# Altium PCB proj_pankov_control_board.PcbDoc (part 2 of 2)
Units mm, origin at the board's own origin, x right, y up, seen from the top; angles counter-clockwise.
Board outline 150 x 100 mm, 2 copper layers (Top Layer, Bottom Layer), stack 1.536 mm thick; 103 components, 103 nets, 425 pads, 60 vias.
Unrouted connection lines stored in the file: 170.
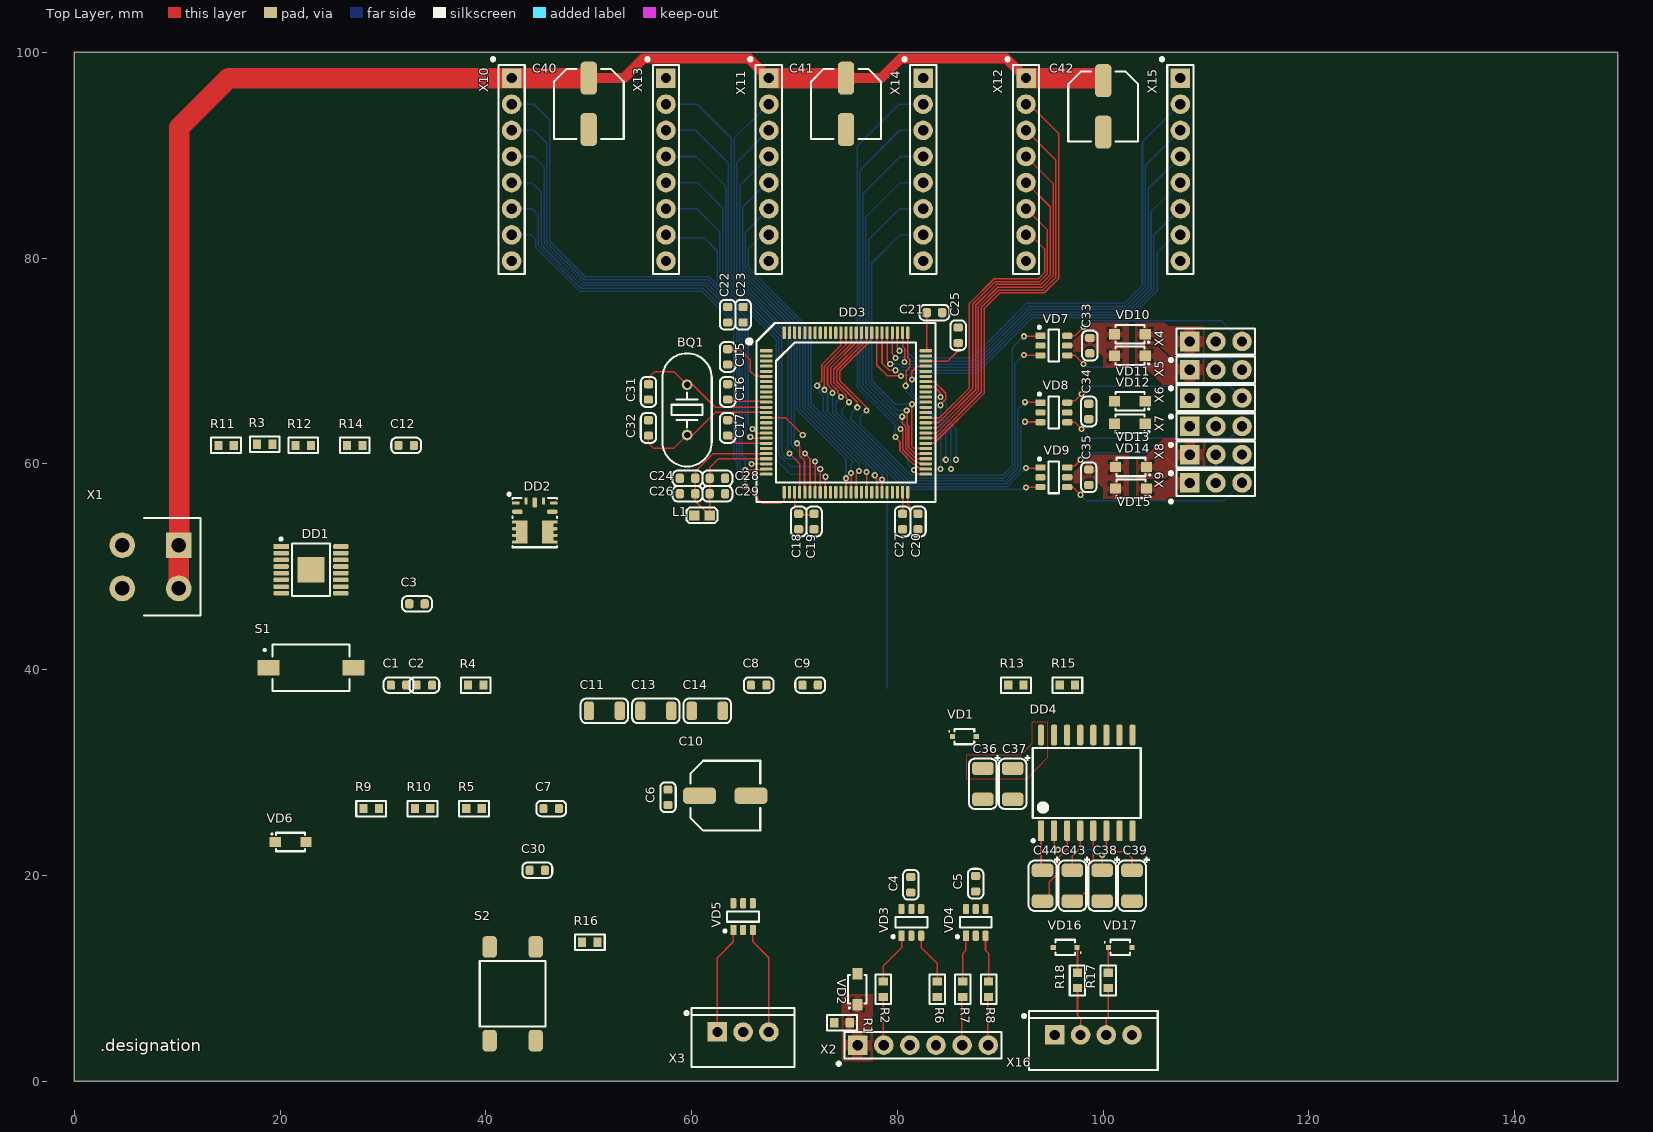
[diagram p0: Top Layer view]

## Via types
v1: diameter 0.6, hole 0.3, Top Layer to Bottom Layer, tented both sides, 60 vias

## Nets (pads, with @x,y where several pads share a name; then routed paths per layer and width w, separated by ;. In a path a pad name is that pad's centre, name@x,y a point inside that pad or via, vN(x,y) a via of type N, cw(c..) or ccw(c..) an arc to the next point about the centre after c; other vN are vias at no path point) (continued)
MCU_DEV1_nFAULT: (continued)
  Bottom Layer w0.15: X13.6 60.5,84.8 62.75,82.55 62.75,77.961 68.475,72.236 68.475,60.886 69.611,59.75 72.25,59.75 v1(72.5,59.5)
MCU_DEV1_nSLEEP: DD3.17 X10.2 | length 51.1
  Top Layer w0.15: v1(65.9,63.4) 66.3,63 DD3.17
  Bottom Layer w0.15: X10.2 44.64,94.96 46.2,93.4 46.2,81.645 49.645,78.2 61.7,78.2 65.475,74.425 65.475,63.825 v1(65.9,63.4)
MCU_DEV1_nSTALL: DD3.34 X13.7 | length 35.3
  Top Layer w0.15: DD3.34 v1(73,58.75)
  Bottom Layer w0.15: X13.7 57.76,82 61.2,82 62.475,80.725 62.475,77.847 68.2,72.122 68.2,60.411 69.611,59 72.628,59 72.878,58.75 v1(73,58.75)
MCU_DEV1_RESET: DD3.18 X10.3 | length 49.4
  Top Layer w0.15: v1(65.7,62.6) 65.8,62.5 DD3.18
  Bottom Layer w0.15: X10.3 44.68,92.42 45.925,91.175 45.925,81.531 49.556,77.9 61.611,77.9 65.2,74.311 65.2,63.1 v1(65.7,62.6)
MCU_DEV1_STEP/AIN1: DD3.23 X10.4 | length 49.2
  Top Layer w0.15: v1(65.8,60) DD3.23
  Bottom Layer w0.15: X10.4 44.62,89.88 45.65,88.85 45.65,81.417 49.442,77.625 61.425,77.625 64.925,74.125 64.925,60.875 v1(65.8,60)
MCU_DEV2_BIN1: DD3.44 X11.6 | length 33.8
  Top Layer w0.15: v1(77.8,58.9) 77.8,58.778 78,58.578 DD3.44
  Bottom Layer w0.15: X11.6 65.225,82.525 65.225,78.986 71.325,72.886 71.325,65.775 77.8,59.3 v1(77.8,58.9)
MCU_DEV2_BIN2: DD3.45 X11.7 | length 31.7
  Top Layer w0.15: DD3.45 78.6,57.35 78.5,57.45 v1(78.5,58.5)
  Bottom Layer w0.15: X11.7 66.86,82.26 65.5,80.9 65.5,79.1 71.6,73 71.6,65.9 76.875,60.625 76.875,60.614 78.5,58.989 v1(78.5,58.5)
MCU_DEV2_DIR/AIN2: DD3.42 X11.5 | length 36.3
  Top Layer w0.15: DD3.42 v1(77,59.2)
  Bottom Layer w0.15: X11.5 67.419,87.421 64.95,84.951 64.95,78.872 71.05,72.772 71.05,65.639 77,59.689 v1(77,59.2)
MCU_DEV2_nFAULT: DD3.55 X14.6 | length 30.8
  Top Layer w0.15: v1(80.9,65.2) 80.963,65.137 80.963,63.833 81.075,63.721 81.075,61.614 81.689,61 DD3.55
  Bottom Layer w0.15: v1(80.9,65.2) 80,65.2 77.225,67.975 77.225,81.825 80.2,84.8 X14.6
MCU_DEV2_nSLEEP: DD3.38 X11.2 | length 44.8
  Top Layer w0.15: DD3.38 v1(75,58.6)
  Bottom Layer w0.15: X11.2 67.761,94.699 67.199,94.699 66.897,95 66.897,94.397 64.125,91.625 64.125,78.53 70.225,72.43 70.225,65.275 75,60.5 v1(75,58.6)
MCU_DEV2_nSTALL: DD3.56 X14.7 | length 28.4
  Top Layer w0.15: v1(81.4,65.8) 81.4,61.7 81.6,61.5 DD3.56 DD3.56@82.3,61.5
  Bottom Layer w0.15: v1(81.4,65.8) 79.789,65.8 77.5,68.089 77.5,79.5 80.26,82.26 X14.7
MCU_DEV2_RESET: DD3.39 X11.3 | length 41.2
  Top Layer w0.15: DD3.39 v1(75.5,59.125)
  Bottom Layer w0.15: X11.3 64.4,89.32 64.4,78.644 70.5,72.544 70.5,65.389 75.7,60.189 75.5,59.989 v1(75.5,59.125)
MCU_DEV2_STEP/AIN1: DD3.40 X11.4 | length 38.7
  Top Layer w0.15: DD3.40 76,59.025 v1(76.275,59.3)
  Bottom Layer w0.15: X11.4 64.675,87.055 64.675,78.758 70.775,72.658 70.775,65.525 76.275,60.025 v1(76.275,59.3)
MCU_DEV3_BIN1: DD3.61 X12.6 | length 29.8
  Top Layer w0.15: DD3.61 82.775,64.025 84.025,64.025 87.3,67.3 87.3,75.511 89.514,77.725 93.814,77.725 94.575,78.486 94.575,82.725 X12.6
MCU_DEV3_BIN2: DD3.62 X12.7 | length 26.9
  Top Layer w0.15: DD3.62 84.111,64.5 87,67.389 87,75.6 89.4,78 93.7,78 94.3,78.6 94.3,80.9 92.94,82.26 X12.7
MCU_DEV3_DIR/AIN2: DD3.60 X12.5 | length 33
  Top Layer w0.15: DD3.60 83.9,63.5 87.6,67.2 87.6,75.422 89.628,77.45 93.928,77.45 94.85,78.372 94.85,84.99 X12.5
MCU_DEV3_nFAULT: DD3.81 X15.6 | length 41.9
  Top Layer w0.15: DD3.81 78.5,69.793 79.193,69.1 v1(79.8,69.1)
  Bottom Layer w0.15: v1(79.8,69.1) 87.611,69.1 92.986,74.475 102.486,74.475 104.919,76.908 104.919,82.219 X15.6
MCU_DEV3_nSLEEP: DD3.57 X12.2 | length 42.8
  Top Layer w0.15: DD3.57 83.578,62 88.425,66.847 88.425,75.08 89.97,76.625 94.27,76.625 95.675,78.03 95.675,92.125 92.84,94.96 X12.2
MCU_DEV3_nSTALL: DD3.82 X15.7 | length 40.9
  Top Layer w0.15: DD3.82 78,69.6 79.05,68.55 v1(80.35,68.55)
  Bottom Layer w0.15: v1(80.35,68.55) 81.043,68.55 81.293,68.8 87.7,68.8 93.1,74.2 102.6,74.2 105.236,76.836 105.236,80.536 106.96,82.26 X15.7
MCU_DEV3_RESET: DD3.58 X12.3 | length 39.4
  Top Layer w0.15: DD3.58 83.689,62.5 88.15,66.961 88.15,75.194 89.856,76.9 94.156,76.9 95.4,78.144 95.4,89.52 X12.3
MCU_DEV3_STEP/AIN1: DD3.59 X12.4 | length 36.2
  Top Layer w0.15: DD3.59 83.8,63 87.875,67.075 87.875,75.308 89.742,77.175 94.042,77.175 95.125,78.258 95.125,87.255 X12.4
MCU_LIMSW_XMAX: DD3.84 VD7.3 | length 42.3
  Top Layer w0.15: v1(76.1,65.5) 76.1,65.996 74.1,67.996 74.1,69.111 77,72.011 DD3.84 ; v1(92.3,70.6) 92.325,70.575 93.875,70.575 VD7.3
  Bottom Layer w0.15: v1(76.1,65.5) 75.5,64.9 75.5,64.333 81.208,58.625 90.358,58.625 91.422,59.689 91.422,69.722 v1(92.3,70.6)
MCU_LIMSW_XMIN: DD3.83 VD7.1 | length 43.4
  Top Layer w0.15: v1(77,65.2) 77,65.5 74.4,68.1 74.4,69.022 77.5,72.122 DD3.83 ; v1(92.3,72.4) 93.85,72.4 VD7.1
  Bottom Layer w0.15: v1(77,65.2) 76.4,64.6 76.4,63.822 81.322,58.9 90.244,58.9 91.147,59.803 91.147,71.247 v1(92.3,72.4)
MCU_LIMSW_YMAX: DD3.86 VD8.3 | length 37.1
  Top Layer w0.15: v1(74.5,66.5) 74.5,66.622 74.2,66.922 74.2,67.118 73.5,67.818 73.5,69.322 76,71.822 DD3.86 ; v1(92.4,64.1) 92.425,64.075 93.875,64.075 VD8.3
  Bottom Layer w0.15: v1(74.5,66.5) 74,66 74,65.056 80.981,58.075 90.586,58.075 91.975,59.464 91.975,63.675 v1(92.4,64.1)
MCU_LIMSW_YMIN: DD3.85 VD8.1 | length 38.5
  Top Layer w0.15: v1(75.3,66) 75.3,66.122 75,66.422 75,66.707 73.8,67.907 73.8,69.2 76.5,71.9 DD3.85 ; v1(92.4,66) 93.85,66 VD8.1
  Bottom Layer w0.15: v1(75.3,66) 74.6,65.3 74.6,64.845 81.095,58.35 90.472,58.35 91.7,59.578 91.7,65.3 v1(92.4,66)
MCU_LIMSW_ZMAX: DD3.88 VD9.3 | length 32.6
  Top Layer w0.15: v1(72.9,67.2) 72.9,69.5 75,71.6 DD3.88 ; v1(92.5,57.7) 92.525,57.725 93.875,57.725 VD9.3
  Bottom Layer w0.15: v1(72.9,67.2) 72.9,67.078 73.2,66.778 73.2,65.078 80.753,57.525 92.203,57.525 92.378,57.7 v1(92.5,57.7)
MCU_LIMSW_ZMIN: DD3.87 VD9.1 | length 32.9
  Top Layer w0.15: v1(73.7,66.9) 73.7,67.2 73.2,67.7 73.2,69.411 75.5,71.711 DD3.87 ; v1(92.5,59.6) 93.85,59.6 VD9.1
  Bottom Layer w0.15: v1(73.7,66.9) 73.7,64.967 80.867,57.8 90.7,57.8 v1(92.5,59.6)
MCU_nINT: DD3.35 VD5.6
MCU_nKILL: DD3.36 VD5.4
MCU_nRST: C30.1 DD3.14 R16.1 S2.1 VD4.6 | length 4.3
  Top Layer w0.15: DD3.14 69.1,64.5 v1(70.8,62.8)
MCU_SPI1_MISO: DD3.31 X13.3 | length 42.9
  Top Layer w0.15: v1(71,61) 71.5,60.5 DD3.31
  Bottom Layer w0.15: X13.3 60.38,92.42 63.575,89.225 63.575,78.303 69.675,72.203 69.675,61.825 70.25,61.25 70.75,61.25 v1(71,61)
MCU_SPI1_MOSI: DD3.32 X13.5 | length 39.4
  Top Layer w0.15: DD3.32 v1(72,60.25)
  Bottom Layer w0.15: X13.5 60.56,87.34 63.025,84.875 63.025,78.075 68.75,72.35 68.75,61 69.25,60.5 71.628,60.5 71.878,60.25 v1(72,60.25)
MCU_SPI1_NSS: DD3.29 X13.4 | length 39.8
  Top Layer w0.15: v1(69.5,61) 70.487,60.013 70.487,57.263 DD3.29
  Bottom Layer w0.15: X13.4 60.42,89.88 63.3,87 63.3,78.189 69.4,72.089 69.4,61 v1(69.5,61)
MCU_SPI1_SCK: DD3.30 X13.2 | length 45.1
  Top Layer w0.15: v1(70.25,62) 70.5,61.75 70.5,60.793 70.968,60.325 70.968,57.282 DD3.30
  Bottom Layer w0.15: X13.2 60.54,94.96 63.85,91.65 63.85,78.417 69.95,72.317 69.95,62.3 v1(70.25,62)
MCU_SPI2_MISO: DD3.53 X14.3 | length 39.4
  Top Layer w0.15: v1(80.3,63.4) 80.525,63.175 80.525,61.386 81.686,60.225 81.871,60.225 82.018,60.078 82.672,60.078 DD3.53
  Bottom Layer w0.15: v1(80.3,63.4) 80.3,63.6 76.35,67.55 76.35,88.55 80.22,92.42 X14.3
MCU_SPI2_MOSI: DD3.54 X14.5 | length 33.6
  Top Layer w0.15: v1(80.463,64.588) 80.463,63.944 80.8,63.607 80.8,61.5 81.8,60.5 DD3.54
  Bottom Layer w0.15: v1(80.463,64.588) 80.212,64.588 76.9,67.9 76.9,84 80.24,87.34 X14.5
MCU_SPI2_NSS: DD3.51 X14.4 | length 37.8
  Top Layer w0.15: v1(81.6,59.4) 81.971,59.029 82.721,59.029 DD3.51
  Bottom Layer w0.15: v1(81.6,59.4) 81.011,59.989 81.011,63.689 80.612,64.088 80.256,64.088 76.625,67.719 76.625,86.225 80.28,89.88 X14.4
MCU_SPI2_SCK: DD3.52 X14.2 | length 42.7
  Top Layer w0.15: v1(79.8,62.6) 80.25,62.15 80.25,61.272 81.572,59.95 81.757,59.95 82.129,59.578 82.672,59.578 DD3.52
  Bottom Layer w0.15: v1(79.8,62.6) 79.8,63.711 76.075,67.436 76.075,90.875 80.16,94.96 X14.2
MCU_SPI3_MISO: DD3.79 X15.3 | length 46.7
  Top Layer w0.15: DD3.79 79.5,70.722 79.8,70.422 v1(79.8,70.3)
  Bottom Layer w0.15: v1(79.8,70.3) 80.364,70.3 80.464,70.4 81,70.4 81.4,70 87.344,70 92.644,75.3 102.144,75.3 104.093,77.249 104.093,89.013 X15.3
MCU_SPI3_MOSI: DD3.80 X15.5 | length 43.3
  Top Layer w0.15: DD3.80 79,70 v1(79.3,69.7)
  Bottom Layer w0.15: v1(79.3,69.7) 80.193,69.7 80.493,69.4 87.522,69.4 92.872,74.75 102.372,74.75 104.643,77.021 104.643,84.483 X15.5
MCU_SPI3_NSS: DD3.77 X15.4 | length 43.8
  Top Layer w0.15: DD3.77 80.5,71.411 80.7,71.211 v1(80.7,69.9)
  Bottom Layer w0.15: v1(80.7,69.9) 80.9,69.7 87.433,69.7 92.758,75.025 102.258,75.025 104.368,77.135 104.368,86.748 X15.4
MCU_SPI3_SCK: DD3.78 X15.2 | length 47.8
  Top Layer w0.15: DD3.78 80,71.322 80.2,71.122 v1(80.2,71)
  Bottom Layer w0.15: v1(80.2,71) 80.875,71 81.575,70.3 87.255,70.3 90.391,73.435 92.555,75.6 102.055,75.6 103.818,77.363 103.818,91.318 106.07,93.57 106.11,93.57 X15.2
MCU_SWCLK: DD3.76 VD3.6 | length 14.9
  Top Layer w0.15: v1(80.8,67.6) 80.85,67.65 80.85,69.05 81.2,69.4 81.2,70.107 81,70.307 DD3.76
  Bottom Layer w0.15: v1(80.8,67.6) 80.832,67.568 80.832,67.075 84.2,63.707 v1(84.2,59.5)
MCU_SWDIO: DD3.72 VD3.4 | length 11.5
  Top Layer w0.15: v1(81.4,68.2) 81.4,68.965 81.925,69.491 82.741,69.491 DD3.72
  Bottom Layer w0.15: v1(81.4,68.2) 81.4,66.896 84.7,63.596 v1(84.7,60.4)
MCU_SWO: DD3.89 VD4.4 | length 38.3
  Top Layer w0.15: v1(72.2,67.6) 72.625,68.025 72.625,69.625 74.5,71.5 DD3.89
  Bottom Layer w0.15: v1(72.2,67.6) 72.4,67.4 72.4,66.993 72.8,66.593 72.8,65.089 79,58.889 79,38.2
MCU_USART1_RX: DD3.69 DD4.12 | length 10.4
  Top Layer w0.15: DD3.69 83.566,68 84.7,66.866 84.7,66.289 84.2,65.789 v1(84.2,65.7)
  Bottom Layer w0.15: v1(84.2,65.7) 84.2,64.485 85.2,63.485 v1(85.2,59.5)
MCU_USART1_TX: DD3.68 DD4.11 | length 8.8
  Top Layer w0.15: DD3.68 82.759,67.491 83.575,67.491 84.2,66.866 v1(84.2,66.5)
  Bottom Layer w0.15: v1(84.2,66.5) 84.737,65.963 84.737,64.337 85.7,63.374 v1(85.7,60.4)
NetBQ1_1: BQ1.1 C32.2 DD3.13 | length 14.2
  Top Layer w0.15: C32.2 55.8,62 56.3,61.5 58.24,61.5 BQ1.1@59.49,62.75 ; BQ1.1@59.55,62.56 BQ1.1@59.74,62.75 ; BQ1.1 BQ1.1@59.49,62.75 ; DD3.13 62.3,65 60.05,62.75 BQ1.1@59.74,62.75 ; BQ1.1@59.49,62.75 BQ1.1@59.74,62.75
NetBQ1_2: BQ1.2 C31.2 DD3.12 | length 14.4
  Top Layer w0.15: C31.2@55.86,67.69 55.86,68.44 56.36,68.94 58.3,68.94 BQ1.2 ; BQ1.2@59.24,67.75 60.05,67.75 62.3,65.5 DD3.12 ; BQ1.2@59.55,67.94 BQ1.2@59.74,67.75
NetC3_1: C3.1 DD1.12
NetC7_1: C7.1 DD1.7 S1.1
NetC8_1: C8.1 C9.1 C10.1 C11.1 DD1.15 DD1.16 DD2.2 R11.2 R12.2 VD6.1
NetC12_2: C12.2 DD2.1 R14.1 R15.2
NetC24_1: C24.1 C26.1 C28.1 C29.1 DD3.21 DD3.22 L1.1 | length 23
  Top Layer w0.15: DD3.22 62.6,60.5 61.75,59.65 C28.1 C29.1 61.75,55.03 61.72,55 60.35,56.37 C26.1 C24.1 60.375,58.625 60.375,59.275 62.1,61 DD3.21
NetC25_1: C25.1 DD3.73 | length 4.3
  Top Layer w0.15: DD3.73 84.9,70 85.9,71 C25.1
NetC27_1: C27.1 DD3.49 | length 2.1
  Top Layer w0.15: C27.1 DD3.49
NetC38_1: C38.1 DD4.2 | length 8
  Top Layer w0.15: DD4.2 95.225,22.875 v1(95.6,22.5) ; C38.1 v1(99.9,22)
  Bottom Layer w0.15: v1(95.6,22.5) 99.4,22.5 v1(99.9,22)
NetC39_1: C39.1 DD4.6 | length 5.7
  Top Layer w0.15: DD4.6 100.305,22.795 100.8,22.3 102.2,22.3 102.8,21.7 C39.1
NetC43_1: C43.1 DD4.4 | length 4.2
  Top Layer w0.15: C43.1 97,21.9 97.765,22.665 DD4.4
NetC43_2: C43.2 DD4.5 | length 7.9
  Top Layer w0.15: C43.2 97.4,17.5 98.338,18.438 98.338,20.731 99.035,21.427 DD4.5
NetC44_1: C44.1 DD4.1 | length 3.9
  Top Layer w0.15: DD4.1 93.955,20.645 C44.1
NetC44_2: C44.2 DD4.3 | length 7.9
  Top Layer w0.15: C44.2 94.194,17.5 94.75,18.056 94.75,19.358 95.6,20.208 95.6,21.7 96.495,22.595 DD4.3
NetDD1_3: DD1.3 R3.1 R4.2
NetDD1_5: DD1.5 R4.1 R5.2
NetDD1_10: DD1.10 R10.2
NetDD1_11: DD1.11 R9.2
NetDD1_14: DD1.14 R11.1
NetDD2_4: DD2.4 DD2.5
NetDD2_9: DD2.9 R12.1 R13.2
NetR1_2: R1.2 VD2.1 X2.1 | length 0.1
  Top Layer w0.15: X2.1@76.17,3.46 X2.1 X2.1@76.17,3.54
NetR2_2: R2.2 VD3.1 | length 5.2
  Top Layer w0.15: R2.2 78.61,11.19 80.41,12.99 VD3.1
NetR6_2: R6.2 VD3.3 | length 5.1
  Top Layer w0.15: VD3.3 82.31,12.99 83.86,11.44 R6.2
NetR7_2: R7.2 VD4.1 | length 4.8
  Top Layer w0.15: R7.2@86.36,9.44 86.36,12.44 86.66,12.74 VD4.1
NetR8_2: R8.2 VD4.3 | length 4.8
  Top Layer w0.15: VD4.3 88.56,12.74 88.86,12.44 R8.2@88.86,9.44
NetR17_1: R17.1 X16.3 | length 4.6
  Top Layer w0.15: X16.3 100.3,6.1 100.5,6.3 R17.1
NetR18_1: R18.1 X16.2 | length 4.7
  Top Layer w0.15: R18.1 97.5,6.4 97.8,6.1 X16.2
NetVD10_1: VD10.1 X4.1 | length 0
NetVD11_1: VD11.1 X5.1
NetVD12_1: VD12.1 X6.1
NetVD13_1: VD13.1 X7.1
NetVD14_1: VD14.1 X8.1
NetVD15_1: VD15.1 X9.1
pads on no net: DD1.4 DD1.13 DD2.6 DD2.7 DD3.1 DD3.2 DD3.3 DD3.4 DD3.5 DD3.7 DD3.8 DD3.9 DD3.15 DD3.16 DD3.37 DD3.41 DD3.43 DD3.46 DD3.47 DD3.48 DD3.63 DD3.64 DD3.65 DD3.66 DD3.67 DD3.70 DD3.71 DD3.90 DD3.91 DD3.92 DD3.93 DD3.95 DD3.96 DD3.97 DD3.98 DD4.7 DD4.8 DD4.9 DD4.10

## Polygon pours and split planes (outlines as drawn)
NetVD15_1 on Top Layer "NETVD15_1_L01_P038" (solid, pour order 38): 103.2,56.5 103.2,58.6 105.5,58.6 106.7,59.8 109.9,59.8 109.9,56.8 106.414,56.8 106.071,56.5
NetVD14_1 on Top Layer "NETVD14_1_L01_P036" (solid, pour order 36): 103.2,58.55 103.2,60.65 104.05,60.65 105.9,62.5 109.9,62.5 109.9,59.8 107.5,59.8 106.071,58.55
+3,3V on Top Layer "+3,3V_L01_P034" (solid, pour order 34): 95.7,59.3 95.7,58.1 97.9,58.1 98.469,58.669 98.951,58.669 100.01,57.61 100.01,56.6 102.5,56.6 102.5,60.9 98.9,60.9 97.3,59.3
+3,3V on Top Layer "+3,3V_L01_P030" (solid, pour order 30): 86.7,29.4 92.62,29.4 94.6,31.5 94.6,34.9 94.406,34.9 93.077,34.9 93.077,32.777 92,31.7 86.7,31.7
NetVD11_1 on Top Layer "NETVD11_1_L01_P026" (solid, pour order 26): 103.1,71.65 103.1,69.55 103.95,69.55 105.8,67.7 109.8,67.7 109.8,70.4 107.4,70.4 105.971,71.65
NetVD10_1 on Top Layer "NETVD10_1_L01_P024" (solid, pour order 24): 103.1,73.7 103.1,71.6 105.4,71.6 106.6,70.4 109.8,70.4 109.8,73.4 106.314,73.4 105.971,73.7
+3,3V on Top Layer "+3,3V_L01_P016" (solid, pour order 16): 95.7,72.1 95.7,70.9 97.9,70.9 98.469,71.469 98.951,71.469 100.01,70.41 100.01,69.4 102.5,69.4 102.5,73.7 98.9,73.7 97.3,72.1
NetR1_2 on Top Layer "NETR1_2_L01_P000" (solid, pour order 0): 77.61,8.44 74.61,8.44 74.61,1.94 77.61,1.94
+3,3V on Top Layer "+3,3V_L01_P032" (solid, pour order 32): 104.5,33.3
+3,3V on Top Layer "+3,3V_L01_P028" (solid, pour order 28): 105.6,29
+3,3V on Top Layer "+3,3V_L01_P022" (solid, pour order 22): 136.9,61.3
+3,3V on Top Layer "+3,3V_L01_P020" (solid, pour order 20): 129,59.9
+3,3V on Top Layer "+3,3V_L01_P018" (solid, pour order 18): 128.95,59.85
no net on Top Layer "NONET_L01_P002" (solid, pour order 2): 137,61

## Silkscreen, mask and mechanical layers (free items; w line width, h text height)
Top Overlay:
  text ".designation" at 2.5,2.5 h2
Bottom Overlay:
  text ".pcb_dec_number" at 18.5,2.5 h2
Board:
  the board outline again, w0.1
Assembly Notes (Mech5):
  text "'.title'" at 0,-2.5 h2
  text "'.project'_'.pcb_dec_number'['.Pcb_File_Name_No_Path']" at 0,-7 h2